# EAGLE board CROWBAR (EAGLE 5.10)
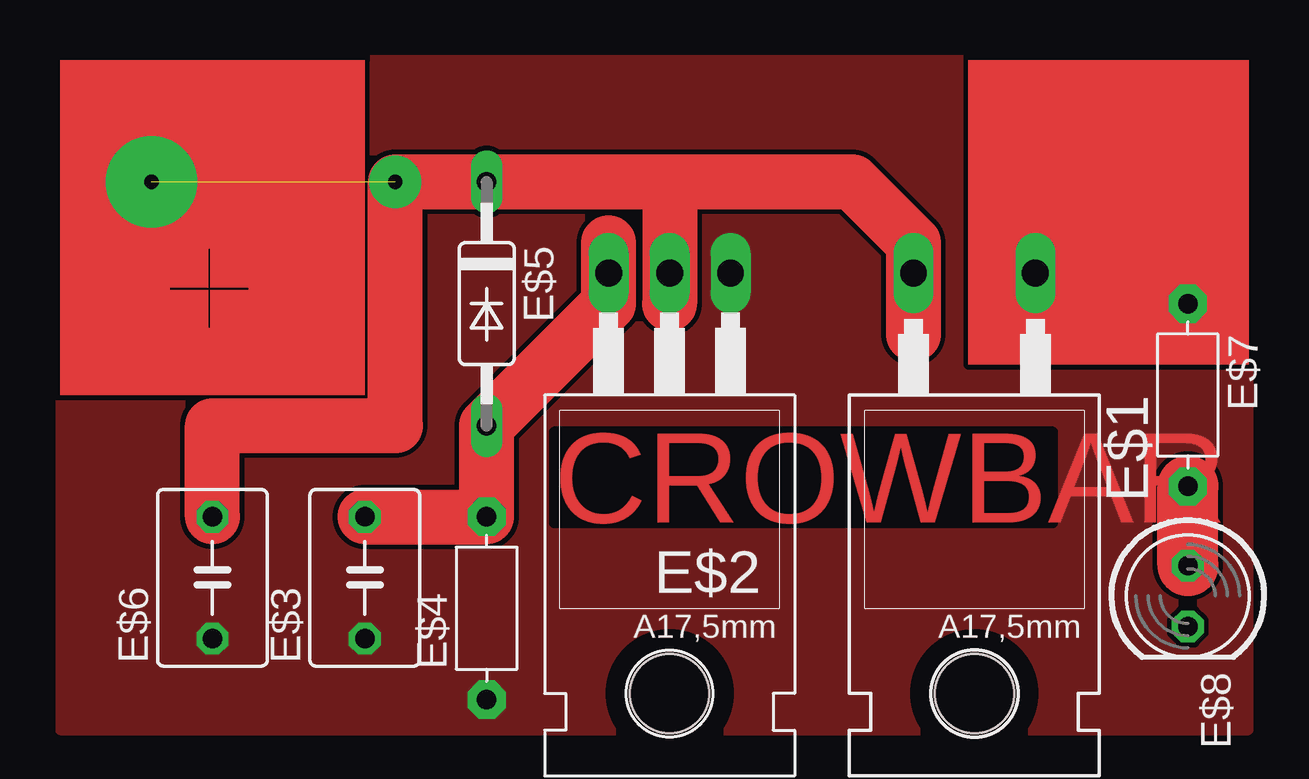
[diagram p0: board, top side]

No outline drawn. Coordinates in mm, seen from the top.
Copper layers (1*16): Top 0.035mm / dielectric 1.5mm / Bottom 0.035mm
Design rules "default": minimum track width 10mil, minimum drill 24mil, track to track 8mil, track to pad 8mil, pad to pad 8mil, via to via 8mil, smd to smd 8mil, copper to edge 40mil, drill to drill 8mil, minimum pad ring 10mil, minimum via ring 8mil, stop-mask expansion 4mil, vias tented up to drill 0mil, thermal gap 10mil

## Footprints (pad centres in the part's own frame; a part is rotated, then mirrored left to right if it is on the bottom)
TO220AC = drill 1.118 long: A 2.54,-6.35; C -2.54,-6.35 | hole 3.302: 0,11.176
TO220 = drill 1.118 long: 1 -2.54,-6.35; 2 0,-6.35; 3 2.54,-6.35 | hole 3.302: 0,11.176
C050-045X075 = drill 0.813 octagon: 1 -2.54,0; 2 2.54,0
R-7,5 = drill 0.813 pad 1.6 octagon: 1 -3.81,0; 2 3.81,0
C2992 = drill 0.813 long: A 5.08,0; C -5.08,0
LED5MM = drill 0.813 octagon: A -1.27,0; K 1.27,0

## Placement (x,y rotation side)
E$1  [TO220AC]  38.1,12.7 180 top
E$2  [TO220]  25.4,12.7 180 top
E$3  [C050-045X075]  12.7,6.35 90 top
E$4  [R-7,5]  17.78,5.08 90 top
E$5  [C2992]  17.78,17.78 270 top
E$6  [C050-045X075]  6.35,6.35 90 top
E$7  [R-7,5]  46.99,13.97 270 top
E$8  [LED5MM]  46.99,5.59 270 top

## Library data of the parts
E$1 E$5 = diode
E$2 E$3 E$6 = ref-packages
E$4 E$7 = discrete
E$8 = led

## Nets
GND: E$2.1 E$3.1 E$4.1 E$6.1
S$2: E$1.C
S$3: E$6.2
S$4: E$7.2 E$8.A
S$5: E$4.2

## Tracks (layer width: path | path; a pad name or v marks a point on that pad's centre or on a via)
GND
  pour Top (no thermals): 49.53,0 49.53,27.94 0,27.94 0,0
S$1
  Top 2.286: 40.64,16.51 40.64,20.32
S$2
  Top 2.286: E$1.C 45.72,19.05
S$3
  Top 2.286: 35.56,16.51 35.56,20.32 33.02,22.86 25.4,22.86 | E$6.2 6.35,12.7 13.97,12.7 13.97,22.86 25.4,22.86 | 25.4,22.86 25.4,17.78
S$4
  Top 2.54: E$8.A E$7.2
S$5
  Top 2.286: 12.7,8.89 E$4.2 17.78,12.7 22.86,17.78 22.86,20.32
S$6  (via drill 0.6 pad 2.18, 0.6 pad 3.81)  (1 unrouted)
  other vias: 13.97,22.86 3.81,22.86
(copper drawn outside any net)
  shapes: Top area x23

## Text on the board
Top: CROWBAR
Unrouted: anode | cathode | Gate | out | 1k | 47nf | 100nf